# EAGLE board 9volt_rail (EAGLE 7.0.0)
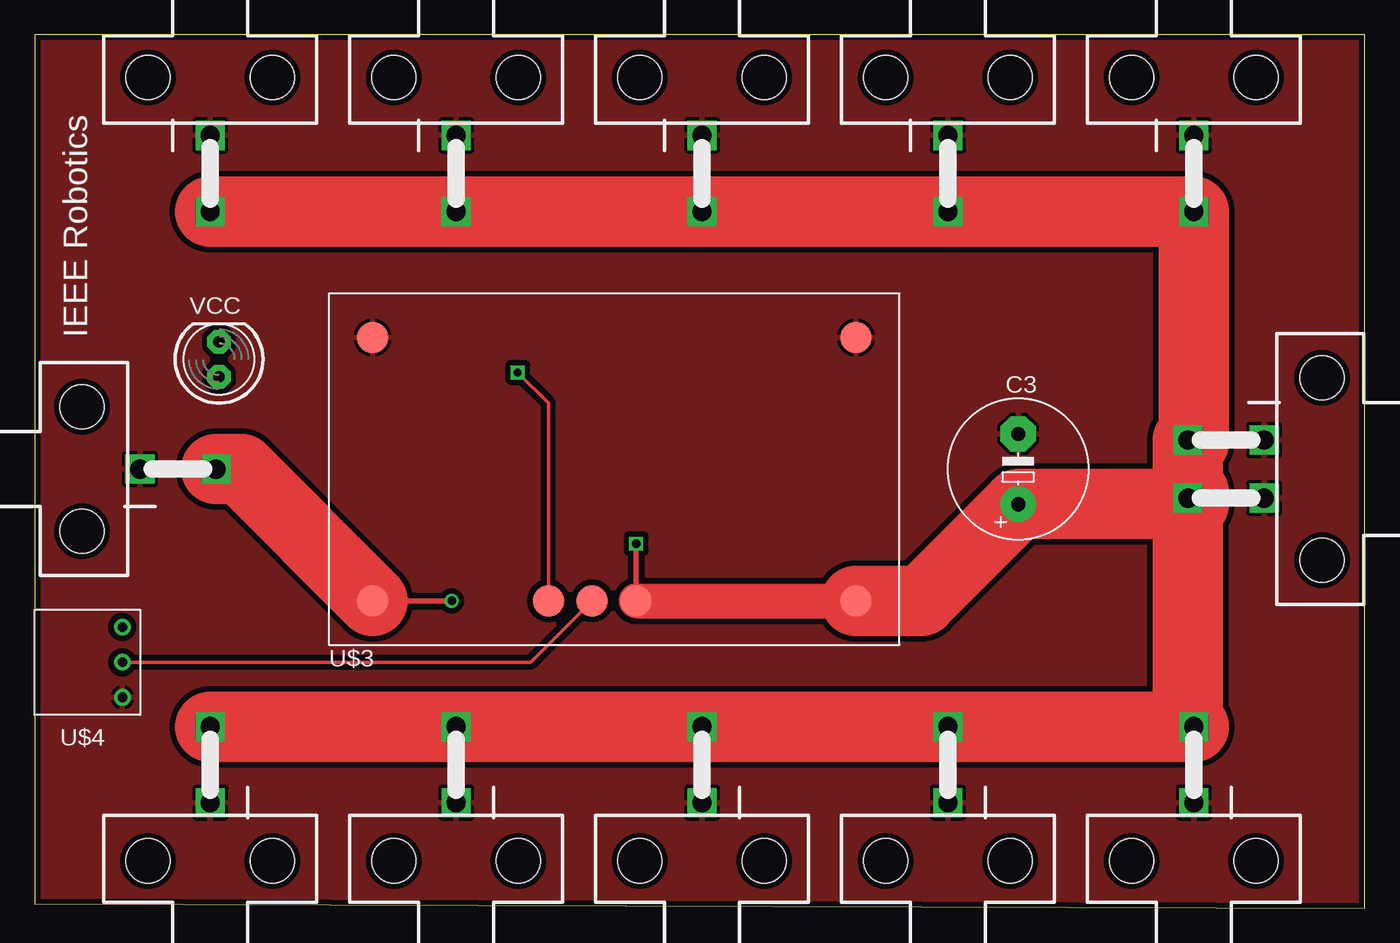
[diagram p0: board, top side]
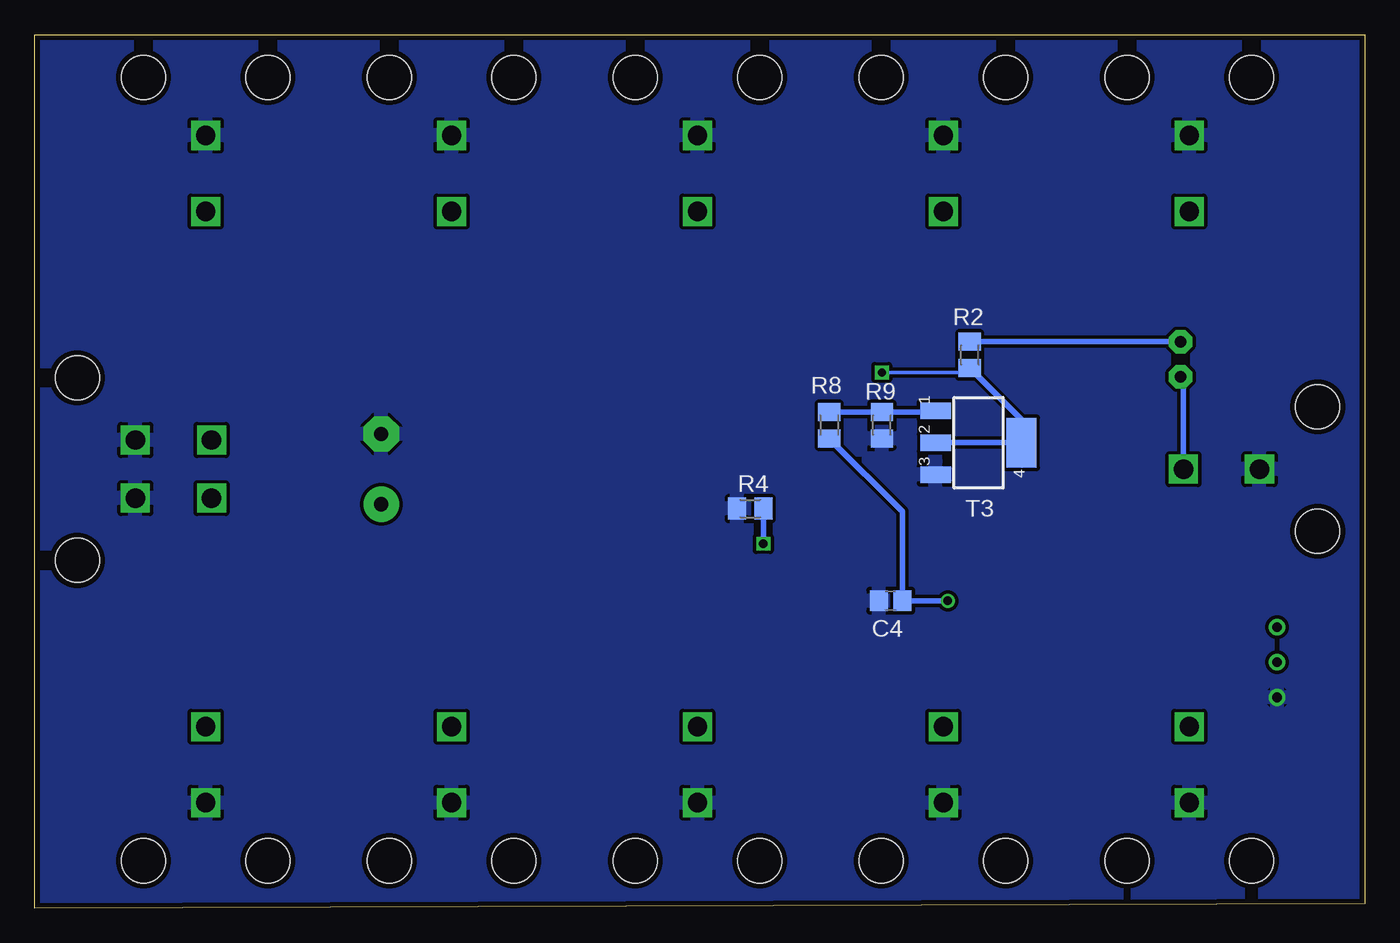
[diagram p1: board, bottom side, seen from below]

Size 96.19 x 63.17 mm. Coordinates in mm from the lower left corner, seen from the top.
Outline: 0,0.32 96.19,0 96.19,63.17 0,63.17 0,0.32
Copper layers (1*16): Top 0.035559375mm / dielectric 1.501140625mm / Bottom 0.035559375mm
Design rules "typical_4pcb *": minimum track width 10mil, minimum drill 15mil, track to track 6mil, track to pad 6mil, pad to pad 6mil, via to via 6mil, smd to smd 6mil, copper to edge 15mil, drill to drill 8mil, minimum pad ring 10mil, minimum via ring 8mil, stop-mask expansion 4mil, vias tented up to drill 0mil, thermal gap 10mil
Net classes: 0 default: width 2.54 mm, drill 0.508 mm, clearance 0.254 mm

## Footprints (pad centres in the part's own frame; a part is rotated, then mirrored left to right if it is on the bottom)
E5-10,5 = drill 1.016 pad 2.54: + -2.54,0 | drill 1.016 pad 2.54 octagon: - 2.54,0
C0805 = smd 1.3 x 1.5: 1 -0.85,0; 2 0.85,0
5569-2 = drill 1.4 square: 1 0,0; 2 0,5.5 | hole 3.2: 4.5,-4.2; -4.5,-4.2
5569-4 = drill 1.4 square: 1 2.1,0; 2 -2.1,0; 3 2.1,5.5; 4 -2.1,5.5 | hole 3.2: 6.6,-4.2; -6.6,-4.2
M0805 = smd 1.3 x 1.6: 1 -0.95,0; 2 0.95,0
SOT223 = smd 1.219 x 2.235: 1 -2.311,-3.099; 2 0,-3.099; 3 2.311,-3.099 | smd 3.6 x 2.2: 4 0,3.099
PTN78020-SND = smd 2.286 x 2.286: 1 -17.462,9.525; 2 -17.462,-9.525; 3 -4.763,-9.525; 4 -1.587,-9.525; 5 1.587,-9.525; 6 17.462,-9.525; 7 17.462,9.525
3310-001-TH = drill 0.7: 1 2.54,0; 2 0,0; 3 -2.54,0
LED5MM = drill 0.813 pad 1.676 octagon: A -1.27,0; K 1.27,0

## Placement (x,y rotation side)
C3  330uF  [E5-10,5]  71.12,31.75 90 top
C4  2.2uF  [C0805]  34.29,22.23 180 bottom
PL1  [5569-2]  66.04,55.88 180 top
PL2  [5569-2]  83.82,55.88 180 top
PL3  [5569-2]  48.26,55.88 180 top
PL4  [5569-2]  30.48,55.88 180 top
PL5  [5569-2]  83.82,7.62 0 top
PL6  [5569-2]  12.7,55.88 180 top
PL7  [5569-2]  66.04,7.62 0 top
PL8  [5569-2]  48.26,7.62 0 top
PL9  [5569-2]  30.48,7.62 0 top
PL10  [5569-2]  12.7,7.62 0 top
PL11  [5569-4]  88.9,31.75 90 top
PL12  [5569-2]  7.62,31.75 270 top
R2  [M0805]  28.57,40.01 270 bottom
R4  [M0805]  44.45,28.89 180 bottom
R8  [M0805]  38.73,34.92 90 bottom
R9  [M0805]  34.92,34.92 270 bottom
T3  [SOT223]  27.94,33.66 270 bottom
U$3  PTH78020-SMD  [PTN78020-SND]  41.91,31.75 0 top
U$4  3310-001  [3310-001-TH]  6.35,17.78 90 top
VCC  [LED5MM]  13.34,39.69 90 top

## Library data of the parts
C3 = rcl
C4 R2 R4 R8 R9 VCC = adafruit
PL1-PL12 = con-molex-2
T3 = zetex; OC_FARNELL: unknown; OC_NEWARK: unknown
U$3 = PTN78020
U$4 = 3310-001

## Nets
GND: C3.- C4.2 PL1.1 PL2.1 PL3.1 PL4.1 PL5.1 PL6.1 PL7.1 PL8.1 PL9.1 PL10.1 PL11.1 PL11.2 PL12.1 R4.2 R9.2 T3.3 U$3.1 U$3.7 U$4.3
N$1: C3.+ PL1.2 PL2.2 PL3.2 PL4.2 PL5.2 PL6.2 PL7.2 PL8.2 PL9.2 PL10.2 PL11.3 PL11.4 R4.1 U$3.5 U$3.6
N$4: R2.1 VCC.K
N$5: R2.2 T3.2 T3.4 U$3.3
N$12: U$3.4 U$4.2
N$14: R8.2 R9.1 T3.1
VCC: C4.1 PL12.2 R8.1 U$3.2 VCC.A

## Tracks (layer width: path | path; a pad name or v marks a point on that pad's centre or on a via)
GND
  pour Bottom: 0,62.87 96.52,62.87 96.52,0 0,0
  pour Top (isolate 0.406): 0,62.87 96.52,62.87 96.52,0 0,0
N$1  (via drill 0.6)
  Top 0.406: v43.5,26.35 U$3.5
  Top 2.54: U$3.5 U$3.6
  Top 5.08: PL6.2 PL4.2 PL3.2 PL1.2 PL2.2 83.82,33.85 | 83.82,30.07 PL11.4 | U$3.6 64.14,22.23 C3.+ 83.4,29.21 | PL11.4 82.96,29.21 | PL10.2 PL9.2 PL8.2 PL7.2 PL5.2 83.4,13.54 83.4,28.89 83.4,29.21 | 83.4,29.21 PL11.4 | PL11.4 PL11.3 83.82,33.85 | 83.82,33.85 83.82,33.66 | 83.82,29.21 83.4,29.21
  Bottom 0.406: R4.1 v43.5,26.35
N$4
  Bottom 0.406: VCC.K R2.1
N$5  (via drill 0.6)
  Top 0.254: U$3.3 37.15,36.51 v34.92,38.73
  Bottom 0.254: v34.92,38.73 28.89,38.73 R2.2
  Bottom 0.406: R2.2 24.84,35.32 T3.4 T3.2
N$12
  Top 0.254: U$3.4 35.88,17.78 U$4.2
N$14
  Bottom 0.406: R8.2 R9.1 31.13,35.88 T3.1
VCC  (via drill 0.6)
  Top 0.406: U$3.2 v30.16,22.23
  Top 5.08: PL12.2 14.92,31.75 U$3.2
  Bottom 0.406: R8.1 33.44,28.68 C4.1 v30.16,22.23 | VCC.A 13.12,38.42 PL12.2

## Text on the board
tNames: IEEE Robotics